# Altium PCB boardBIG (backup).PcbDoc
Units mil, origin at the board's own origin, x right, y up, seen from the top; angles counter-clockwise.
Board outline 3600 x 3600 mil, 2 copper layers (Top Layer, Bottom Layer); 46 components, 41 nets, 168 pads, 2 vias.
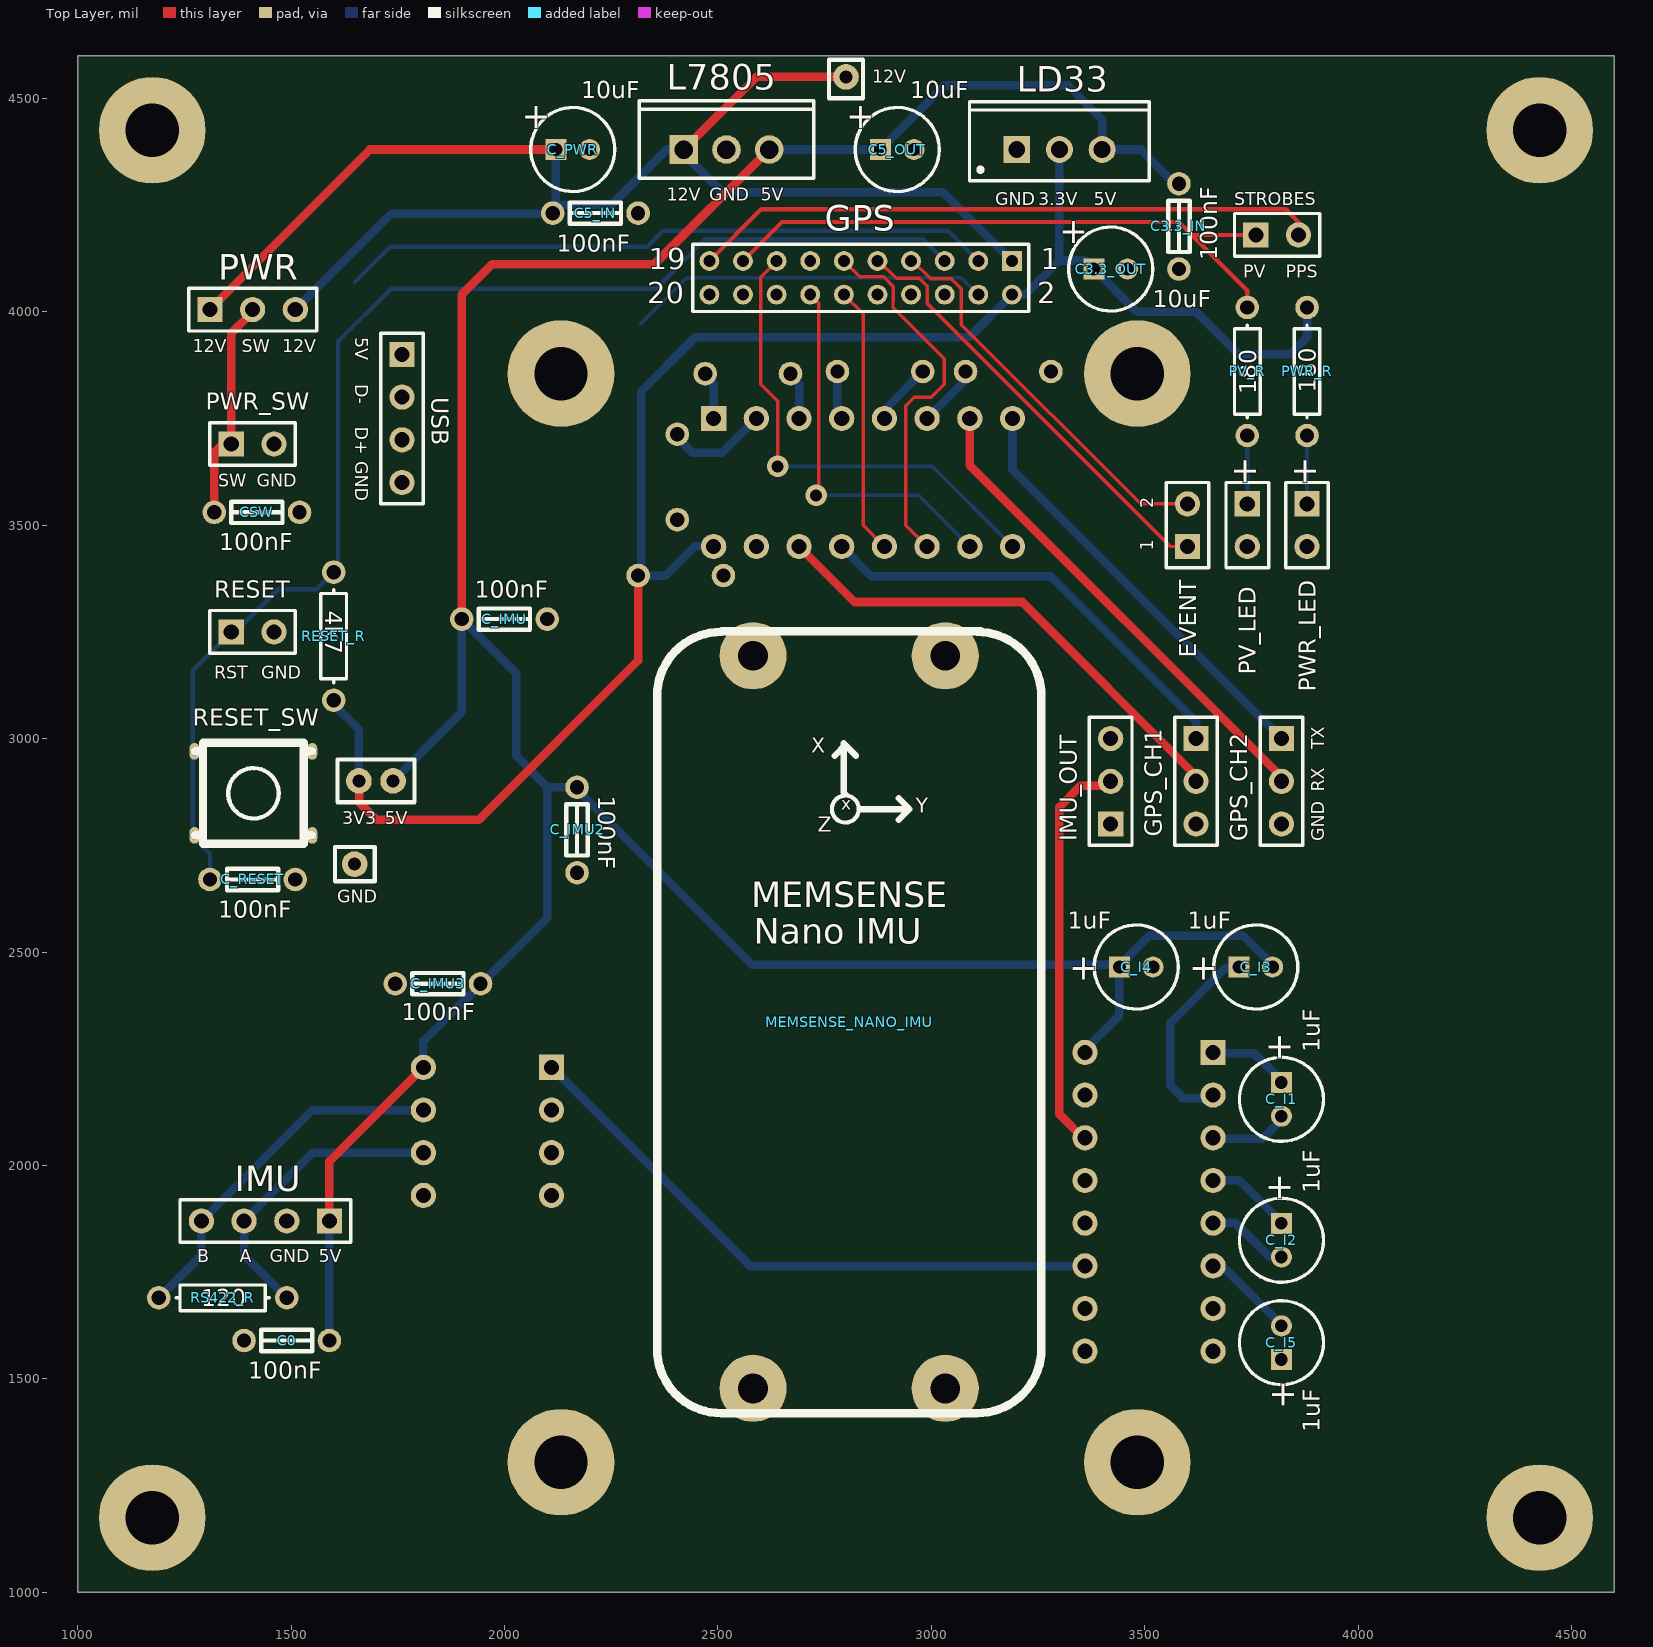
[diagram p0: Top Layer view]
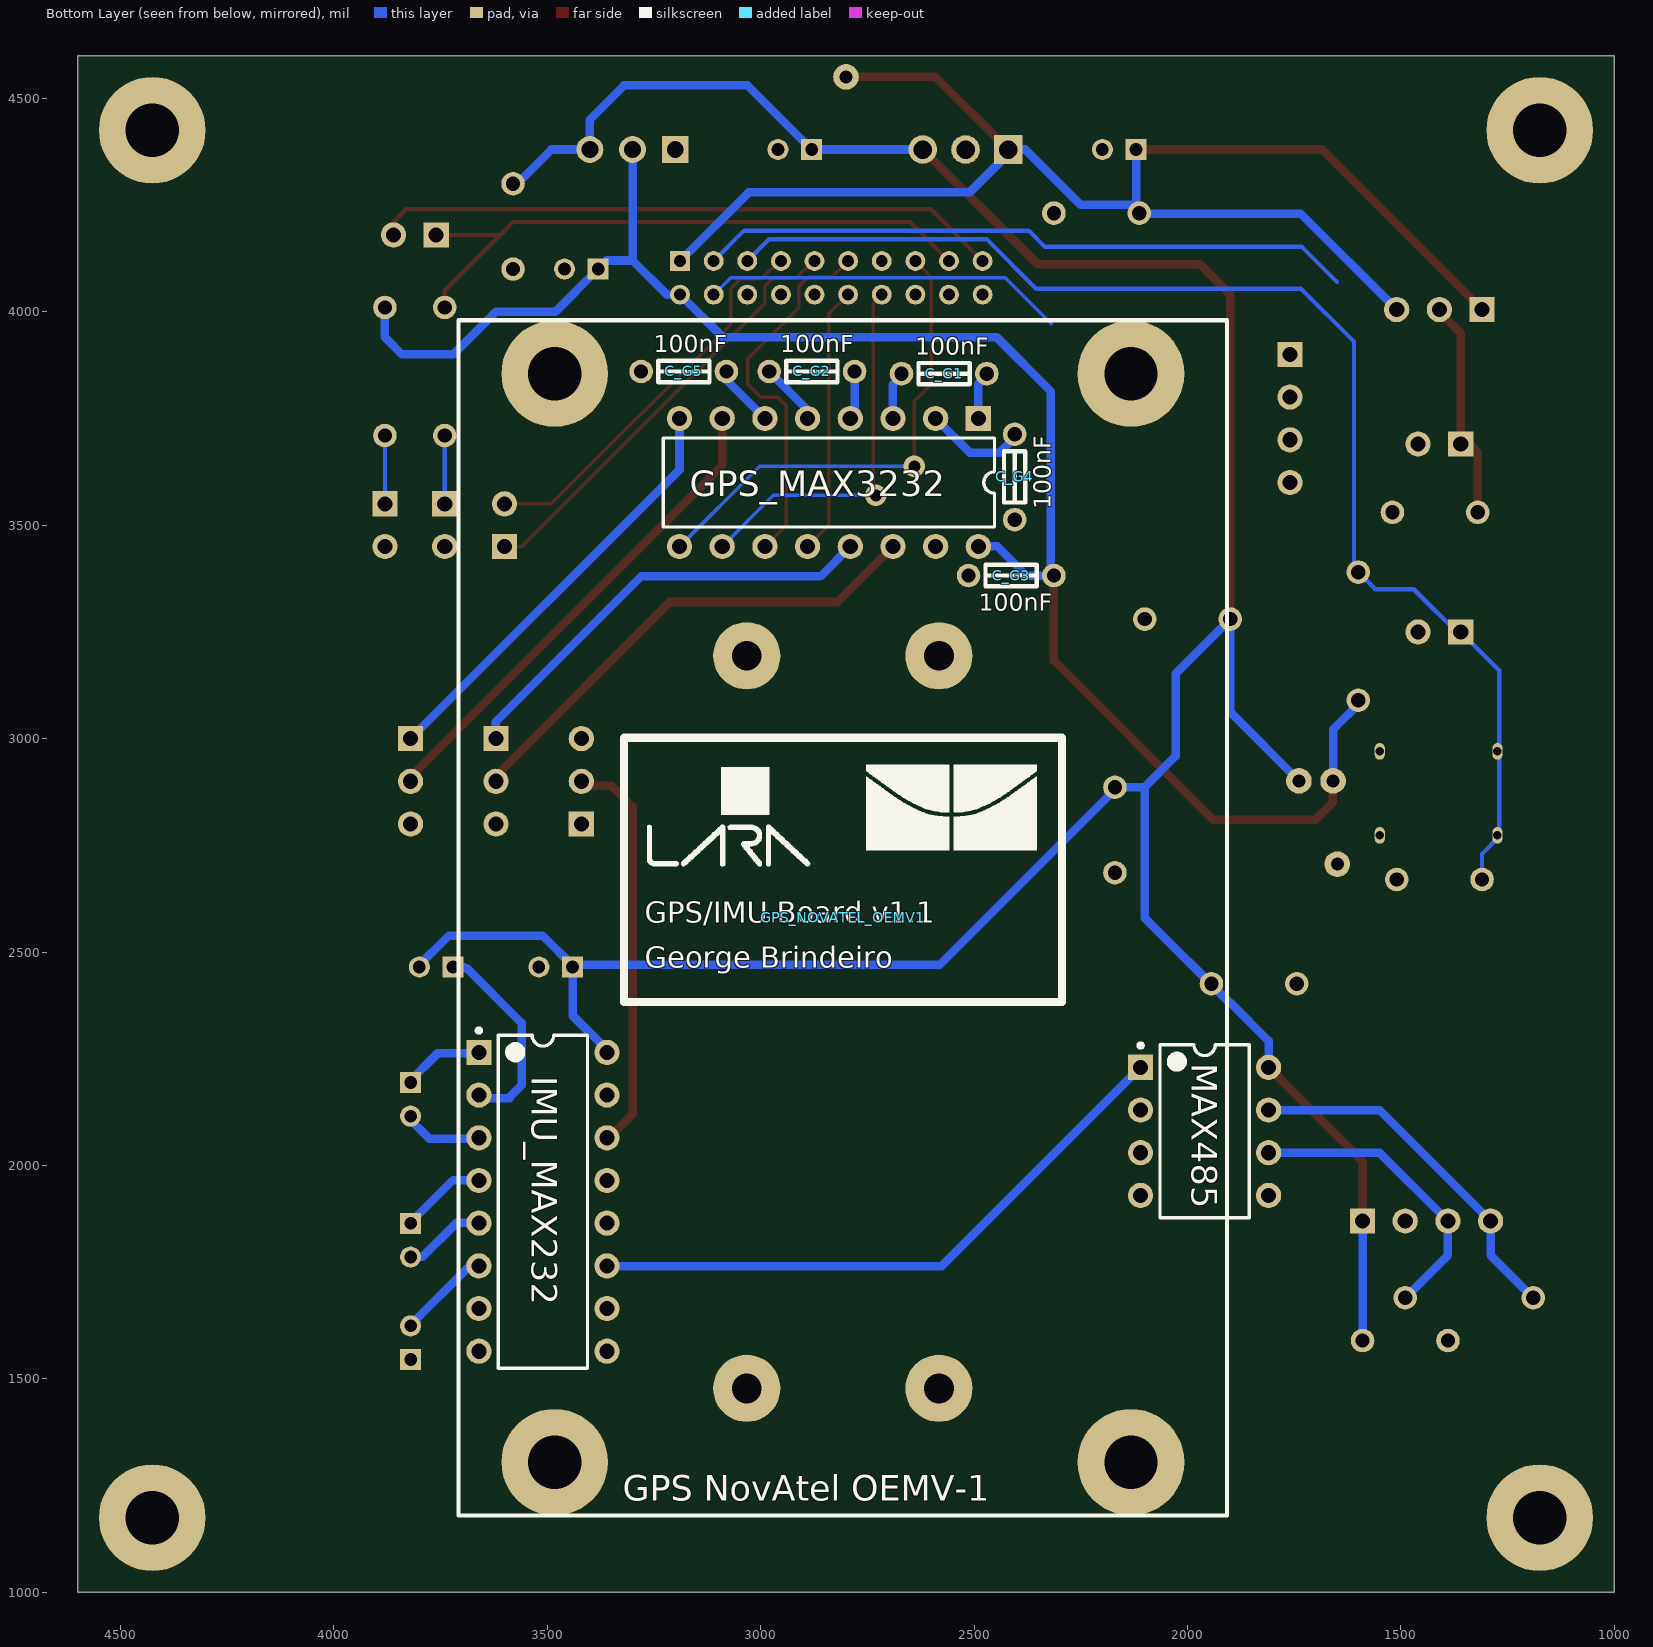
[diagram p1: Bottom Layer view, seen from below]

## Layer stack, top to bottom
Top Layer: signal copper 1.4
Dielectric: dielectric 12.6, FR-4, Dk 4.8
Bottom Layer: signal copper 1.4

## Board outline
1000,1000 4600,1000 4600,4600 1000,4600

## Design rules (kind name [scope] priority, off if disabled: settings)
Clearance [All] p1: gap=8
FabricationTestPointUsage TestPointUsage [All] p1: valid=0 allowmultiple=FALSE
FabricationTestpoint Testpoint [All] p1: side=3 testpointundercomponent=TRUE minsize=40 maxsize=100 preferedsize=60 minholesize=0 maxholesize=40 preferedholesize=32 testpointgrid=1 allowsidetop=TRUE allowsidebottom=TRUE usegrid=TRUE gridtolerance=0.01
HoleSize [All] p1: absolutevalues=TRUE maxlimit=100 minlimit=20 maxpercent=80.000 minpercent=20.000
PolygonConnect [All] p1: connectstyle=Relief reliefconductorwidth=10 reliefentries=4 polygonreliefangle="90 Angle"
RoomDefinition schematic [InComponentClass('schematic')] p1: confinementstyle=ConfineIn formatcopy=TRUE lockcomponents=FALSE outline 830,790 540,790 540,4750 830,4750
RoutingVias [All] p1: holewidth=28 width=50 viastyle="Through Hole" minholewidth=28 minwidth=50 maxholewidth=28 maxwidth=50
SilkscreenOverComponentPads [All] p1: minsilkscreentomaskgap=10
SolderMaskExpansion [All] p1: expansion=4
Width [All] p1: maxlimit=20 minlimit=8 preferedwidth=10
24 further rules are at their usual default settings.

## Components (designator, comment, footprint, x,y, rotation, side; value= is the part's Value field where it differs from the comment)
C0 "100nF" C_NANO_HOLES 1390,1590 r0 top
C3.3_IN "100nF" C_NANO_HOLES 3580,4300 r270 top
C3.3_OUT "10uF" B 3420,4100 r0 top
C5_IN "100nF" C_NANO_HOLES 2113,4231 r0 top
C5_OUT "10uF" B 2920,4380 r0 top
C_G1 "100nF" C_NANO_HOLES 2670,3855 r180 bottom
C_G2 "100nF" C_NANO_HOLES 2980,3860 r180 bottom
C_G3 "100nF" C_NANO_HOLES 2513,3382 r180 bottom
C_G4 "100nF" C_NANO_HOLES 2405,3513 r90 bottom
C_G5 "100nF" C_NANO_HOLES 3280,3860 r180 bottom
C_I1 "1uF" B 3820,2155 r270 top
C_I2 "1uF" B 3820,1825 r270 top
C_I3 "1uF" B 3760,2465 r0 top
C_I4 "1uF" B 3480,2465 r0 top
C_I5 "1uF" B 3820,1585 r90 top
C_IMU "100nF" C_NANO_HOLES 2100,3280 r180 top
C_IMU2 "100nF" C_NANO_HOLES 2170,2686 r90 top
C_IMU3 "100nF" C_NANO_HOLES 1744,2426 r0 top
C_PWR "10uF" B 2160,4380 r0 top
C_RESET "100nF" C_NANO_HOLES 1510,2670 r180 top
CSW "100nF" C_NANO_HOLES 1320,3530 r0 top
EVENT "Header 2" HDR1X2 3600,3450 r90 top
GPS "Header 10X2" HDR2x10_2mm 2480,4040 r0 top
GPS_CH1 "MHDR1X3" HDR1X3 3620,3000 r270 top
GPS_CH2 "MHDR1X3" HDR1X3 3820,3000 r270 top
GPS_MAX3232 "MAX3232EEPE" PE16 2840,3600 r0 bottom
GPS_NOVATEL_OEMV1 "Comment" GPS_NOVATEL_OEMV1 2807.46,2580 r180 bottom locked
IMU "Header 4" HDR1X4 1590,1870 r180 top
IMU_MAX232 "MAX232ACPE" PE16A 3510,1915 r180 bottom
IMU_OUT "MHDR1X3" HDR1X3 3420,2800 r90 top
L7805 "L7805ACV" TO220ABN 2520,4380 r0 top
LD33 "LD33V" T03B 3300,4380 r0 top
MAX485 "MAX485CPA" PA8 1960,2080 r180 bottom (schematic designator IMU_MAX485)
MEMSENSE_NANO_IMU "Comment" MEMSENSE_NANO_IMU 2357.46,1420 r0 top locked
PV_LED "PV" HDR1X2 3740,3550 r270 top
PV_R "180" AXIAL-0.3 3740,3860 r90 top
PWR "Header 3" HDR1X3 1310,4005 r0 top
PWR_LED "PWR" HDR1X2 3880,3550 r270 top
PWR_R "180" AXIAL-0.3 3880,3860 r90 top
PWR_SW "Header 2" HDR1X2 1360,3690 r0 top
RESET "Header 2" HDR1X2 1360,3250 r0 top
RESET_R "4k7" AXIAL-0.3 1600,3240 r270 top
RESET_SW "SW-PB" PUSHBUTTON 1530,2990 r180 top
RS422_R "120" AXIAL-0.3 1340,1690 r180 top
STROBES "Header 2" HDR1X2 3760,4180 r0 top
USB "Header 4" HDR1X4 1760,3900 r270 top

## Footprints (in the part's own frame and the unit in brackets; to place one, negate y for a bottom-side part, rotate by r counter-clockwise, add the part's x,y. Pads: shape width x height; smd on the part's side, far side on the other; paste and mask are expansions set on the pad)
AXIAL-0.3 [mm] "Resistor; 2 Leads"
  round 1.4 hole 0.85: 1(-3.81,0) 2(3.81,0)
  silkscreen extent -2.77,-0.76 2.77,0.76
B [mm] "Capacitor, Electrolytic, Radial; Body 5 x 6.8 mm (Dia.xH typ); Pin Spacing 2 mm (typ)"
  rect 1.25x1.25 hole 0.75: 1(-1,0)
  round 1.25 hole 0.75: 2(1,0)
  silkscreen extent -2.5,-2.5 2.5,2.5
C_NANO_HOLES [mm] "C_NANO com furos maiores"
  round 1.4 hole 0.85: 1(0,0) 2(5.08,0)
  silkscreen extent 1.02,-0.64 4.06,0.64
GPS_NOVATEL_OEMV1 [mil]
  round 250 hole 125: 0(675,1275) 1(-675,1275) 2(-675,-1275) 3(675,-1275)
  silkscreen extent -900,-1400 900,1400
HDR1X2 [mm] "Connector; Header; 2 Position"
  rect 1.5x1.5 hole 0.9: 1(0,0)
  round 1.5 hole 0.9: 2(2.54,0)
  silkscreen extent -1.27,-1.27 3.81,1.27
HDR1X3 [mm] "Connector; Header; 3 Position"
  rect 1.5x1.5 hole 0.9: 1(0,0)
  round 1.5 hole 0.9: 2(2.54,0) 3(5.08,0)
  silkscreen extent -1.27,-1.27 6.35,1.27
HDR1X4 [mm] "Connector; Header; 4 Position"
  rect 1.5x1.5 hole 0.9: 1(0,0)
  round 1.5 hole 0.9: 2(2.54,0) 3(5.08,0) 4(7.62,0)
  silkscreen extent -1.27,-1.27 8.89,1.27
HDR2x10_2mm [mm]
  rect 1.18x1.18 hole 0.71: 1(18,2)
  round 1.18 hole 0.71: 2(18,0) 3(16,2) 4(16,0) 5(14,2) 6(14,0) 7(12,2) 8(12,0) 9(10,2) 10(10,0) 11(8,2) 12(8,0) 13(6,2) 14(6,0) 15(4,2) 16(4,0) 17(2,2) 18(2,0) 19(0,2) 20(0,0)
  silkscreen extent -1,-1 19,3
MEMSENSE_NANO_IMU [mil]
  round 157.48 hole 70: 0(225,1774) 1(675,1774) 2(225,58) 3(675,58)
  silkscreen extent 0,0 900,1832
PA8 [mm] "DIP, 8-Leads, Row Spacing 7.62mm, Pitch 2.54mm, Body 9.38x7.24mm"
  rect 1.5x1.5 hole 0.9: 1(-3.81,3.81)
  round 1.5 hole 0.9: 2(-3.81,1.27) 3(-3.81,-1.27) 4(-3.81,-3.81) 5(3.81,-3.81) 6(3.81,-1.27) 7(3.81,1.27) 8(3.81,3.81)
  silkscreen extent -3.94,-5.15 2.65,5.23, body extent -3.6,-5.15 3.6,5.15, height 4.58
PE16 [mm] "DIP; 16 Leads; Row Spacing 7.62 mm; Pitch 2.54 mm"
  rect 1.5x1.5 hole 0.9: 1(-8.89,-3.81)
  round 1.5 hole 0.9: 2(-6.35,-3.81) 3(-3.81,-3.81) 4(-1.27,-3.81) 5(1.27,-3.81) 6(3.81,-3.81) 7(6.35,-3.81) 8(8.89,-3.81) 9(8.89,3.81) 10(6.35,3.81) 11(3.81,3.81) 12(1.27,3.81) 13(-1.27,3.81) 14(-3.81,3.81) 15(-6.35,3.81) 16(-8.89,3.81)
  silkscreen extent -9.85,-2.65 9.85,2.65
PE16A [mm] "DIP, 16-Leads, Row Spacing 7.62mm, Pitch 2.54mm, Body 19.18x6.99mm"
  rect 1.5x1.5 hole 0.9: 1(-3.81,8.89)
  round 1.5 hole 0.9: 2(-3.81,6.35) 3(-3.81,3.81) 4(-3.81,1.27) 5(-3.81,-1.27) 6(-3.81,-3.81) 7(-3.81,-6.35) 8(-3.81,-8.89) 9(3.81,-8.89) 10(3.81,-6.35) 11(3.81,-3.81) 12(3.81,-1.27) 13(3.81,1.27) 14(3.81,3.81) 15(3.81,6.35) 16(3.81,8.89)
  silkscreen extent -3.94,-9.9 2.65,10.31, body extent -3.3,-9.9 3.3,9.9, height 5.08
PUSHBUTTON [mm]
  oval 0.6x1 hole 0.5: 1(-0.5,5.5) 1(-0.5,0.5) 2(6.5,5.5) 2(6.5,0.5)
  silkscreen extent -0.5,0 6.5,6
T03B [mm] "TO, Thru-Hole, Vertical, Heatsink Mounted; 3 In-Line Leads; Pitch 2.54 mm"
  rect 1.6x1.6 hole 1: 1(-2.54,0)
  round 1.6 hole 1: 2(0,0) 3(2.54,0)
  silkscreen extent -5.35,-1.85 5.35,2.85, body extent -5.4,-1.9 5.4,2.9, height 19.4
TO220ABN [mm] "TO, Thru-Hole, Vertical, Heatsink Mounted; 3 In-Line Leads; Pitch 2.54 mm; Pin sequence 1, 3, 2"
  rect 1.7x1.7 hole 1.1: 1(-2.54,0)
  round 1.7 hole 1.1: 2(2.54,0) 3(0,0)
  silkscreen extent -5.2,-1.7 5.2,2.9

## Part data
C0 C3.3_IN C5_IN C_G1 C_G2 C_G3 C_G4 C_G5 C_IMU C_IMU2 C_IMU3 C_RESET CSW: library part Cap, "Capacitor"
C3.3_OUT C5_OUT C_I1 C_I2 C_I3 C_I4 C_I5 C_PWR: library part "Cap Pol1", "Polarized Capacitor (Radial)"
EVENT STROBES: "Header, 2-Pin"
GPS: "Header, 10-Pin, Dual row"
GPS_CH1 GPS_CH2 IMU_OUT: "Header, 3-Pin"
GPS_MAX3232: "±15kV ESD-Protected, 3.0V to 5.5V, Low-Power, up to 250kbps, True RS-232 Transceiver"
IMU USB: "Header, 4-Pin"
IMU_MAX232: "+5V Powered, Multi-Channel RS-232 Driver/Receiver"
L7805: "Precision 1A Regulator"
LD33: library part LM1117T-3.3, "800mA Low-Dropout Linear Regulator"
MAX485: "Low-Power, Slew-Rate-Limited RS-485/RS-422 Transceiver"
PV_LED PWR_LED: library part LED0, "Typical INFRARED GaAs LED"
PV_R PWR_R RESET_R RS422_R: library part Res1, "Resistor"
PWR: library part "Header 3H", "Header, 3-Pin, Right Angle"
PWR_SW RESET: library part "Header 2H", "Header, 2-Pin, Right Angle"
RESET_SW: "Switch"

## Free pads (board coordinates)
  round 250 hole 125: 0(1175,4425) 1(4425,4425) 2(4425,1175) 3(1175,1175)
  round 60 hole 30: 0(1659,2901) 1(1739,2901) 2(2800,4550) 3(1649,2706)

## Via types
v1: diameter 50, hole 28, Top Layer to Bottom Layer, 2 vias

## Nets (pads, with @x,y where several pads share a name; then routed paths per layer and width w, separated by ;. In a path a pad name is that pad's centre, name@x,y a point inside that pad or via, vN(x,y) a via of type N, cw(c..) or ccw(c..) an arc to the next point about the centre after c; other vN are vias at no path point)
3.3V: C3.3_OUT.1 C_G3.2 GPS.2 GPS_MAX3232.16 LD33.2 pad.0@1659,2901 PWR_R.2 RESET_R.2 | length 4049
  Top Layer w20: pad.0@1660,2900 1660,2850 1700,2810 1940,2810 2313,3183 C_G3.2
  Bottom Layer w20: RESET_R.2@1595,3085 1659,3021 pad.0@1659,2901 ; C_G3.2 C_G3.2@2320,3382 ; C_G3.2@2320,3367 C_G3.2@2320,3382 ; GPS_MAX3232.16@2489,3451 2446,3451 2377,3382 C_G3.2@2320,3382 ; LD33.2 3300,4120 ; PWR_R.2@3880,4000 3880,3940 3840,3900 3720,3900 3620,4000 3480.63,4000 C3.3_OUT.1 3360.63,4120 3300,4120 ; C_G3.2@2320,3382 2320,3813 2447,3940 3088.66,3940 GPS.2 3220,4040 3300,4120
5V: C0.2 C3.3_IN.1 C5_OUT.1 C_I3.2 C_I4.1 C_IMU2.2 C_IMU3.2 C_IMU.2 IMU.1 IMU_MAX232.16 L7805.2 LD33.3 MAX485.8 pad.1@1739,2901 | length 7332.3
  Top Layer w20: IMU.1 1590,2010 MAX485.8 ; C_IMU.2 1900,4040 1971,4111 2351,4111 L7805.2
  Bottom Layer w20: C0.2@1590,1600 IMU.1@1590,1860 ; pad.1@1739,2901 1900,3062 C_IMU.2 2028,3152 2028,2959 2100,2887 2100,2580 1900,2380 1898,2380 1810,2292 MAX485.8 ; 2101,2886 C_IMU2.2 ; C_IMU2.2@2171,2880 2581,2470 3438,2470 C_I4.1@3440,2468 ; L7805.2 C5_OUT.1 3030.63,4530 3320,4530 3400,4450 LD33.3 3490,4380 C3.3_IN.1@3565,4305 ; IMU_MAX232.16@3359,2270 3440,2351 C_I4.1@3440,2468 ; C_I4.1@3439,2467 C_I4.1@3440,2468 ; C_I3.2@3800,2469 3731,2538 3510,2538 C_I4.1@3440,2468
12V: C5_IN.1 C_PWR.1 GPS.1 L7805.1 PWR.1 PWR.3 | length 3513.2
  Top Layer w20: PWR.1 1685,4380 C_PWR.1 C_PWR.1@2130,4380 ; L7805.1@2420,4370 L7805.1 2590,4550 2800,4550
  Bottom Layer w20: PWR.3 1735,4230 C5_IN.1@2100,4230 ; C5_IN.1@2110,4230 C5_IN.1@2100,4230 ; C_PWR.1 C5_IN.1@2120.63,4250.63 ; L7805.1@2420,4370 2510,4280 3027.4,4280 GPS.1 ; L7805.1 2380,4380 2250.63,4250.63 C5_IN.1@2120.63,4250.63 ; C5_IN.1@2100,4230 C5_IN.1@2120.63,4250.63
GND: C0.1 C3.3_IN.2 C3.3_OUT.2 C5_IN.2 C5_OUT.2 C_G3.1 C_G4.1 C_G5.1 C_I4.2 C_I5.1 C_IMU2.1 C_IMU3.1 C_IMU.1 C_PWR.2 C_RESET.1 CSW.2 GPS.10 GPS.13 GPS.16 GPS.18 GPS_CH1.3 GPS_CH2.3 GPS_MAX3232.15 IMU.2 IMU_MAX232.15 IMU_OUT.3 L7805.3 LD33.1 MAX485.2 MAX485.3 MAX485.4 MAX485.5 PV_LED.2 PWR_LED.2 PWR_SW.2 RESET.2 RESET_SW.1
GPS_CAN2_RX: GPS.8
GPS_CAN2_TX: GPS.20
GPS_COM1_RX: GPS.12 GPS_MAX3232.12 | length 629.4
  Top Layer w8: GPS.12 2840,3994.96 2840,3500 GPS_MAX3232.12
GPS_COM1_TX: GPS.11 GPS_MAX3232.11 | length 895
  Top Layer w8: GPS.11@2794.96,4105.04 GPS.11 2832.19,4081.51 2888.49,4081.51 2910.93,4059.07 2910.93,4024.58 2910,4023.65 2910,4010 3030,3890 3030,3830 3000,3800 2960,3800 2940,3780 2940,3500 GPS_MAX3232.11
GPS_COM2_RX: GPS.15 GPS_MAX3232.9 | length 1140.7
  Top Layer w8: GPS.15 2600,4081.26 2600,3830 2640,3790 v1(2640,3637.97)
  Bottom Layer w8: v1(2640,3637.97) 3002.03,3637.97 GPS_MAX3232.9
GPS_COM2_TX: GPS.14 GPS_MAX3232.10 | length 890.4
  Top Layer w8: GPS.14 2736,4020.22 2736,3576 v1(2730,3570)
  Bottom Layer w8: v1(2730,3570) 2970,3570 GPS_MAX3232.10
GPS_EVENT1: EVENT.1 GPS.9 | length 1026.7
  Top Layer w8: GPS.9@2876.01,4118.74 2876.72,4118.74 2917.23,4078.23 2971.77,4078.23 2990.67,4059.33 2990.67,4019.33 3560,3450 EVENT.1
  Top Layer w10: GPS.9 GPS.9@2876.01,4118.74
GPS_EVENT2: EVENT.2 GPS.7 | length 932.2
  Top Layer w8: GPS.7 2956.72,4118.74 2998.23,4077.23 3046.6,4077.23 3070,4053.83 3070,3970 3490,3550 EVENT.2
GPS_PPS: GPS.19 STROBES.2 | length 1476.8
  Top Layer w10: GPS.19 2601.26,4240 3830,4240 3870,4200 STROBES.2@3870,4180
GPS_PV: GPS.17 PV_R.2 STROBES.1 | length 1503.6
  Top Layer w10: GPS.17 2650,4210 3580,4210 3610,4180 ; PV_R.2 3740,4050 3610,4180 ; STROBES.1 3610,4180
  Bottom Layer w20: STROBES.1@3740,4160 STROBES.1
GPS_RESETIN: C_RESET.2 GPS.5 RESET.1 RESET_R.1 RESET_SW.2 | length 3015.8
  Bottom Layer w10: C_RESET.2 1310,2730 1270,2770 1270,3160 RESET.1 ; RESET.1@1360,3240 1470,3350 1560,3350 RESET_R.1 ; RESET_R.1@1610,3390 1610,3930 1734,4054 2246,4054 ; 2248,4054 2355,4054 2471,4170 2979.92,4170 GPS.5
GPS_USB_D+: GPS.4 | length 852.2
  Bottom Layer w8: 2319,3972 2427,4080 3069.92,4080 GPS.4
GPS_USB_D-: GPS.3 | length 1539.1
  Bottom Layer w10: 1650,4070 1732,4152 2334,4152 2372,4190 3038.66,4190 GPS.3
GPS_VARF: GPS.6
IMU_HRS_A: IMU.3 MAX485.6 RS422_R.1 | length 707.7
  Bottom Layer w20: RS422_R.1 1390,1790 IMU.3 1550,2030 MAX485.6
IMU_HRS_B: IMU.4 MAX485.7 RS422_R.2 | length 849.1
  Bottom Layer w20: RS422_R.2 1290,1790 IMU.4 1550,2130 MAX485.7
IMU_TX: IMU_MAX232.11 MAX485.1 | length 1443
  Bottom Layer w20: MAX485.1 2576,1764 IMU_MAX232.11@3360,1764
J1_RX: GPS_CH1.2 GPS_MAX3232.14 | length 1152.6
  Top Layer w20: GPS_MAX3232.14 2820,3320 3212.66,3320 GPS_CH1.2@3620,2912.66
J1_TX: GPS_CH1.1 GPS_MAX3232.13 | length 1039.8
  Bottom Layer w20: GPS_MAX3232.13 2860,3380 3280,3380 3620,3040 GPS_CH1.1
J2_RX: GPS_CH2.2 GPS_MAX3232.7 | length 1142.4
  Top Layer w20: GPS_MAX3232.7 3090,3640 GPS_CH2.2@3820,2910
J2_TX: GPS_CH2.1 GPS_MAX3232.8 | length 1011
  Bottom Layer w20: GPS_MAX3232.8 3190,3630 GPS_CH2.1
J3_RX: IMU_MAX232.14 IMU_OUT.2 | length 954.6
  Top Layer w20: IMU_MAX232.14@3360,2069 3360,2060 3300,2120 3300,2840 3350,2890 IMU_OUT.2@3420,2890
NetC_G1_1: C_G1.1 GPS_MAX3232.3 | length 113.3
  Bottom Layer w20: C_G1.1@2670,3850 2690,3830 GPS_MAX3232.3@2690,3745
NetC_G1_2: C_G1.2 GPS_MAX3232.1 | length 113.3
  Bottom Layer w20: C_G1.2@2470,3850 2490,3830 GPS_MAX3232.1@2490,3745
NetC_G2_1: C_G2.1 GPS_MAX3232.5 | length 147.3
  Bottom Layer w20: GPS_MAX3232.5 2890,3770 C_G2.1
NetC_G2_2: C_G2.2 GPS_MAX3232.4 | length 114.1
  Bottom Layer w20: C_G2.2 2780,3760 GPS_MAX3232.4
NetC_G4_2: C_G4.2 GPS_MAX3232.2 | length 243.9
  Bottom Layer w20: C_G4.2@2397,3713 2440,3670 2510,3670 GPS_MAX3232.2
NetC_G5_2: C_G5.2 GPS_MAX3232.6 | length 147.3
  Bottom Layer w20: GPS_MAX3232.6 3080,3840 C_G5.2
NetC_I1_1: C_I1.1 IMU_MAX232.1 | length 199.3
  Bottom Layer w20: IMU_MAX232.1@3657,2263 3756.37,2263 C_I1.1@3827,2192.37
NetC_I1_2: C_I1.2 IMU_MAX232.3 | length 191
  Bottom Layer w20: IMU_MAX232.3@3657,2063 3776.37,2063 C_I1.2@3827,2113.63
NetC_I2_1: C_I2.1 IMU_MAX232.4 | length 201.7
  Bottom Layer w20: IMU_MAX232.4@3661,1966 3720.37,1966 C_I2.1@3821,1865.37
NetC_I2_2: C_I2.2 IMU_MAX232.5 | length 192.9
  Bottom Layer w20: IMU_MAX232.5@3661,1866 3712,1866 3791.37,1786.63 C_I2.2@3821,1786.63
NetC_I3_1: C_I3.1 IMU_MAX232.2 | length 479.7
  Bottom Layer w20: IMU_MAX232.2@3660,2158 3588,2158 3589,2159 3560,2188 3560,2334 3688,2462 3699.26,2462 3696.26,2465 C_I3.1@3719,2465
NetC_I5_2: C_I5.2 IMU_MAX232.6 | length 218.3
  Bottom Layer w20: IMU_MAX232.6@3661,1766 3680.37,1766 C_I5.2@3821,1625.37
NetPV_LED_1: PV_LED.1 PV_R.1 | length 160
  Bottom Layer w10: PV_LED.1 PV_R.1
NetPWR_LED_1: PWR_LED.1 PWR_R.1 | length 160
  Bottom Layer w10: PWR_LED.1 PWR_R.1
PWR_SW_2: CSW.1 PWR.2 PWR_SW.1 | length 494.9
  Top Layer w20: CSW.1 1320,3670 1340,3690 PWR_SW.1@1350,3690 ; PWR_SW.1 1360,3950 PWR.2@1400,3990
pads on no net: GPS_NOVATEL_OEMV1.0 GPS_NOVATEL_OEMV1.1 GPS_NOVATEL_OEMV1.2 GPS_NOVATEL_OEMV1.3 IMU_MAX232.7 IMU_MAX232.8 IMU_MAX232.9 IMU_MAX232.10 IMU_MAX232.12 IMU_MAX232.13 IMU_OUT.1 MEMSENSE_NANO_IMU.0 MEMSENSE_NANO_IMU.1 MEMSENSE_NANO_IMU.2 MEMSENSE_NANO_IMU.3 USB.1 USB.2 USB.3 USB.4

## Silkscreen, mask and mechanical layers (free items; w line width, h text height)
Top Overlay:
  lines w10: 1603,2666 1603,2746 1696,2746 1696,2666 1603,2666 ; 1609,2851 1789,2851 1789,2951 1609,2951 1609,2851 ; 2760,4500 2760,4590 2840,4590 2840,4500 2760,4500
  text "12V" at 2862,4536 h30
  text "12V" at 2380,4260 h30
  text "GND" at 2480,4260 h30
  text "5V" at 2600,4260 h30
  text "GND" at 3150,4250 h30
  text "3.3V" at 3250,4250 h30
  text "5V" at 3380,4250 h30
  text "PV" at 3730,4080 h30
  text "PPS" at 3830,4080 h30
  text "5V" at 1650,3940 h30 r270
  text "12V" at 1270,3905 h30
  text "SW" at 1385.01,3905 h30
  text "12V" at 1480,3905 h30
  text "D-" at 1650,3830 h30 r270
  text "D+" at 1650,3730 h30 r270
  text "+" at 3710.01,3660 h60 r270
  text "+" at 3850.01,3660 h60 r270
  text "GND" at 1650,3650 h30 r270
  text "SW" at 1330,3590 h30
  text "GND" at 1420,3590 h30
  text "2" at 3520,3540 h30 r90
  text "1" at 3520,3440 h30 r90
  text "RST" at 1320,3140 h30
  text "GND" at 1430,3140 h30
  text "TX" at 3920,2975.01 h30 r90
  text "RX" at 3920,2875.01 h30 r90
  text "3V3" at 1620,2800 h30
  text "5V" at 1720,2800 h30
  text "GND" at 3920,2760.01 h30 r90
  text "GND" at 1608,2616 h30
  text "B" at 1280,1773 h30
  text "A" at 1380,1773 h30
  text "GND" at 1450.01,1773 h30
  text "5V" at 1565.01,1773 h30
Bottom Overlay:
  drawing of 1222 lines, arcs and shapes, not listed
  text "GPS/IMU Board v1.1" at 3272,2569 h50
  text "George Brindeiro" at 3272,2463 h50

## Text inside footprints (layer, text, board x,y; h text height)
C3.3_OUT: Top Overlay "+" at 3300,4160 h59.06
C5_OUT: Top Overlay "+" at 2800,4430 h59.06
C_I1: Top Overlay "+" at 3790.47,2311.5 h59.06 r270
C_I2: Top Overlay "+" at 3790.47,1981.5 h59.06 r270
C_I3: Top Overlay "+" at 3603.5,2435.47 h59.06
C_I4: Top Overlay "+" at 3323.5,2435.47 h59.06
C_I5: Top Overlay "+" at 3849.53,1428.5 h59.06 r90
C_PWR: Top Overlay "+" at 2040,4430 h59.06
GPS: Top Overlay "20" at 2333.87,4020.31 h50; Top Overlay "19" at 2338.04,4099.06 h50; Top Overlay "1" at 3256.05,4099.06 h50; Top Overlay "2" at 3247.72,4020.31 h50
GPS_NOVATEL_OEMV1: Bottom Overlay "GPS NovAtel OEMV-1" at 3322.46,1215 h60
MEMSENSE_NANO_IMU: Top Overlay "Z" at 2733.46,2770 h60; Top Overlay "Y" at 2963.46,2815 h60; Top Overlay "X" at 2718.46,2955 h60; Top Overlay "x" at 2788.46,2823 h50; Top Overlay "MEMSENSE" at 2578.46,2605 h60; Top Overlay "Nano IMU" at 2583.53,2520 h60